# EAGLE board avr (EAGLE 5.07)
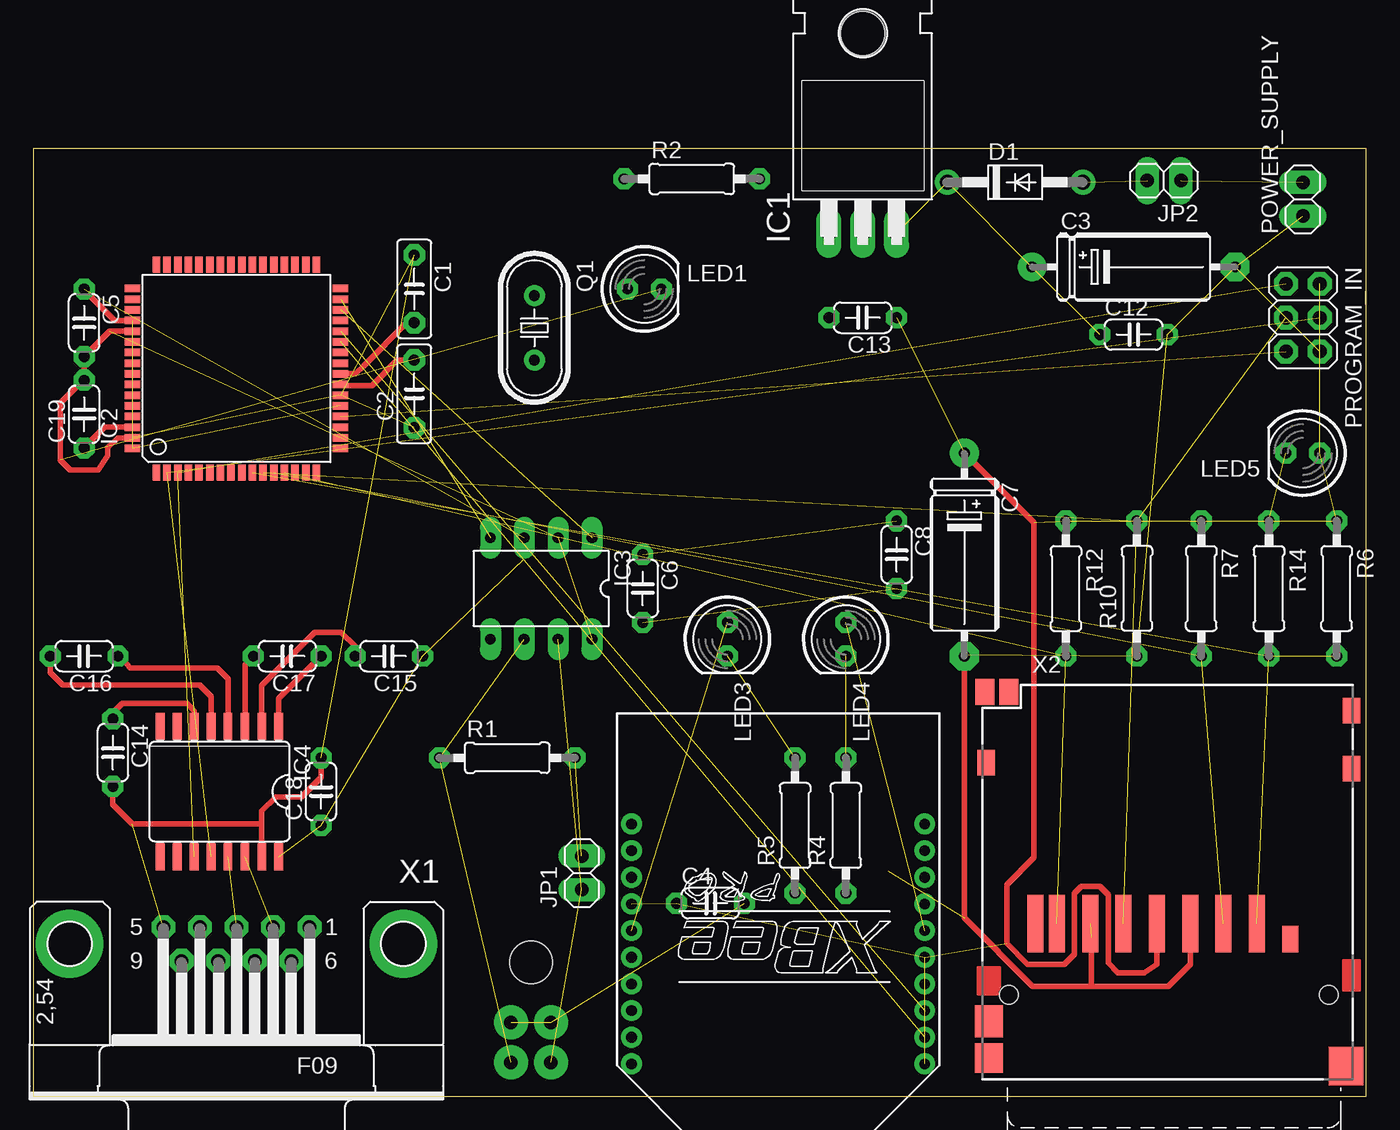
[diagram p0: board, top side]
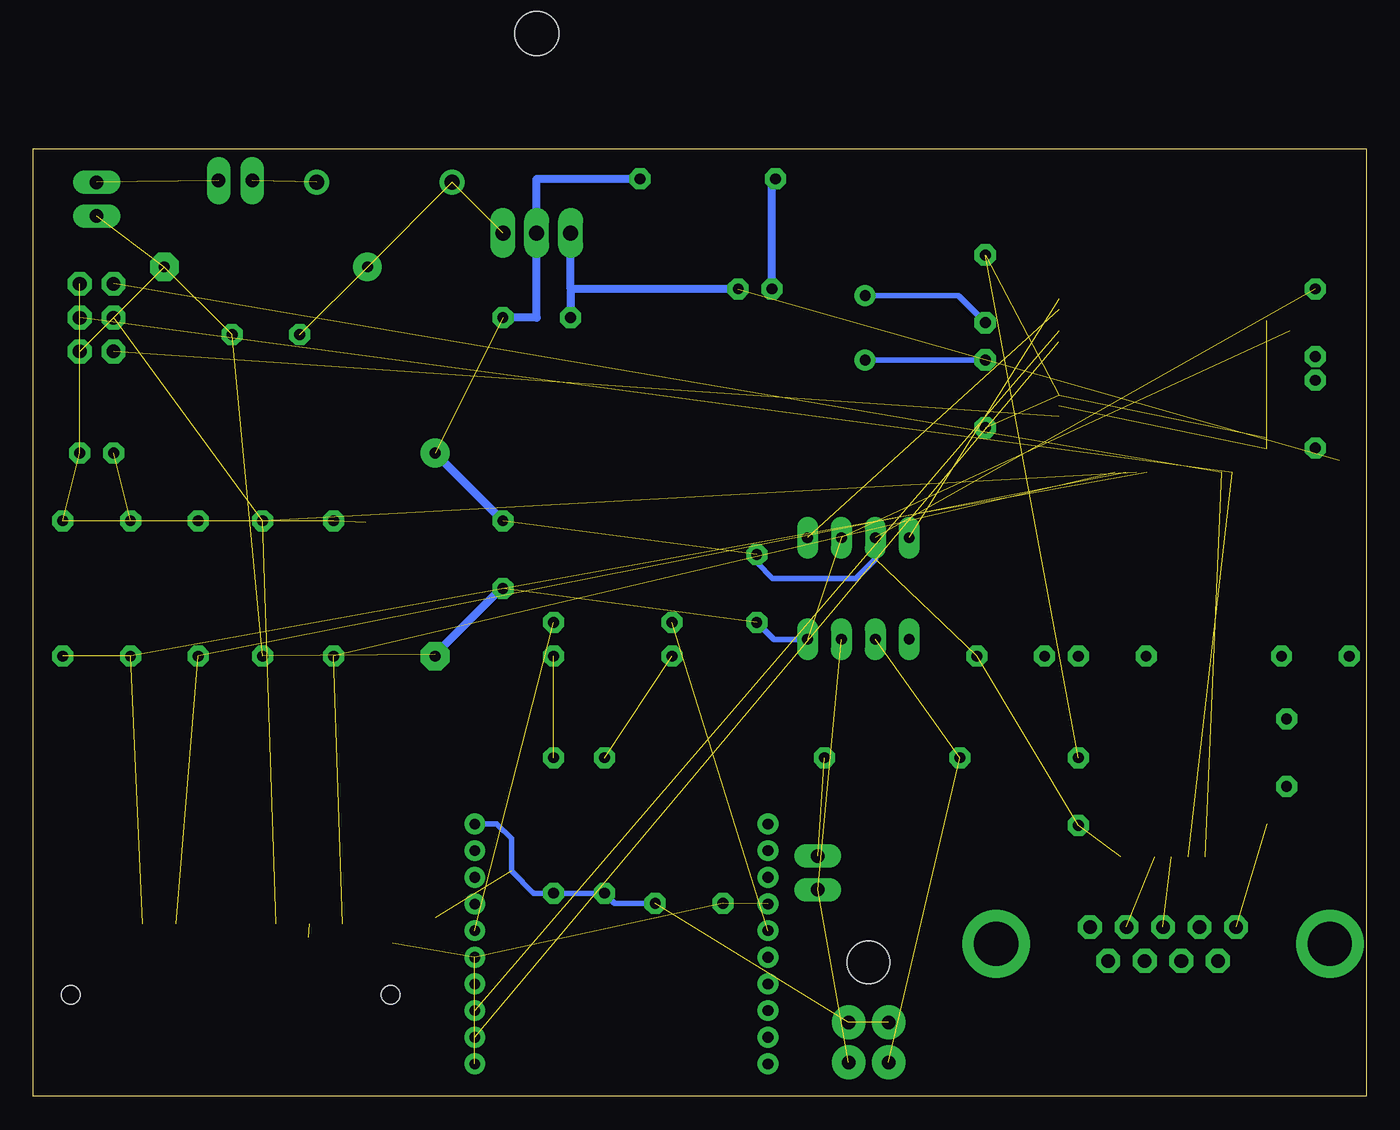
[diagram p1: board, bottom side, seen from below]

Size 100 x 71.11 mm. Coordinates in mm from the lower left corner, seen from the top.
Outline: 0,0 100,0 100,71.11 0,71.11 0,0
Copper layers (1*16): Top 0.035mm / dielectric 1.5mm / Bottom 0.035mm
Design rules "default *": minimum track width 10mil, minimum drill 24mil, track to track 12mil, track to pad 12mil, pad to pad 8mil, via to via 12mil, smd to smd 8mil, copper to edge 40mil, drill to drill 8mil, minimum pad ring 15mil, minimum via ring 8mil, stop-mask expansion 4mil, vias tented up to drill 0mil, thermal gap 10mil
tRestrict: area 43.2,1.3 to 45.7,21.6; area 66,1.3 to 68.6,21.6; area 33,40.6 to 43.2,43.2; area 33,33 to 43.2,35.6; area 35.4,1.9 to 39.2,7; area 34.3,1.3 to 40.6,6.3; area 59.7,31.8 to 62.2,36.8; area 50.8,31.8 to 53.3,35.6; area 50.8,35.6 to 53.3,36.8; area 92.7,47 to 97.8,49.5; area 94,64.8 to 96.5,69.8; area 92.7,54.6 to 97.8,62.2; 7 more areas

## Footprints (pad centres in the part's own frame; a part is rotated, then mirrored left to right if it is on the bottom)
C5B2.5 = drill 0.813 pad 1.6 octagon: 1 -2.54,0; 2 2.54,0
E15-5 = drill 0.813 pad 2.159 round: + -7.62,0 | drill 0.813 pad 2.159 octagon: - 7.62,0
C050-024X044 = drill 0.813 octagon: 1 -2.54,0; 2 2.54,0
DO41-10 = drill 1.118 round: A 5.08,0; C -5.08,0
TO220H = drill 1.118 long: 1 -2.54,-10.16; 2 0,-10.16; 3 2.54,-10.16 | hole 3.302: 0,4.826
TQFP64 = smd 1.194 x 0.559: 1 -7.8,6; 2 -7.8,5.2; 3 -7.8,4.4; 4 -7.8,3.6; 5 -7.8,2.8; 6 -7.8,2; 7 -7.8,1.2; 8 -7.8,0.4; 9 -7.8,-0.4; 10 -7.8,-1.2; 11 -7.8,-2; 12 -7.8,-2.8; 13 -7.8,-3.6; 14 -7.8,-4.4; 15 -7.8,-5.2; 16 -7.8,-6; 33 7.8,-6; 34 7.8,-5.2; 35 7.8,-4.4; 36 7.8,-3.6; 37 7.8,-2.8; 38 7.8,-2; 39 7.8,-1.2; 40 7.8,-0.4; 41 7.8,0.4; 42 7.8,1.2; 43 7.8,2; 44 7.8,2.8; 45 7.8,3.6; 46 7.8,4.4; 47 7.8,5.2; 48 7.8,6 | smd 0.559 x 1.194: 17 -6,-7.8; 18 -5.2,-7.8; 19 -4.4,-7.8; 20 -3.6,-7.8; 21 -2.8,-7.8; 22 -2,-7.8; 23 -1.2,-7.8; 24 -0.4,-7.8; 25 0.4,-7.8; 26 1.2,-7.8; 27 2,-7.8; 28 2.8,-7.8; 29 3.6,-7.8; 30 4.4,-7.8; 31 5.2,-7.8; 32 6,-7.8; 49 6,7.8; 50 5.2,7.8; 51 4.4,7.8; 52 3.6,7.8; 53 2.8,7.8; 54 2,7.8; 55 1.2,7.8; 56 0.4,7.8; 57 -0.4,7.8; 58 -1.2,7.8; 59 -2,7.8; 60 -2.8,7.8; 61 -3.6,7.8; 62 -4.4,7.8; 63 -5.2,7.8; 64 -6,7.8
DIL08 = drill 0.813 long: 1 -3.81,-3.81; 2 -1.27,-3.81; 3 1.27,-3.81; 4 3.81,-3.81; 5 3.81,3.81; 6 1.27,3.81; 7 -1.27,3.81; 8 -3.81,3.81
SO16L = smd 0.66 x 2.032: 1 -4.445,-4.902; 2 -3.175,-4.902; 3 -1.905,-4.902; 4 -0.635,-4.902; 5 0.635,-4.902; 6 1.905,-4.902; 7 3.175,-4.902; 8 4.445,-4.902; 9 4.445,4.902; 10 3.175,4.902; 11 1.905,4.902; 12 0.635,4.902; 13 -0.635,4.902; 14 -1.905,4.902; 15 -3.175,4.902; 16 -4.445,4.902
1X02 = drill 1.016 long: 1 -1.27,0; 2 1.27,0
LED5MM = drill 0.813 octagon: A -1.27,0; K 1.27,0
2X03 = drill 1.016 octagon: 1 -2.54,-1.27; 2 -2.54,1.27; 3 0,-1.27; 4 0,1.27; 5 2.54,-1.27; 6 2.54,1.27
HC49U70 = drill 0.813 round: 1 -2.413,0; 2 2.413,0
0207/10 = drill 0.813 octagon: 1 -5.08,0; 2 5.08,0
MICROFIT4SOCK = drill 1 pad 2.54 round: PIN1 -2,0; PIN2 1,0; PIN3 -2,-3; PIN4 1,-3 | hole 3.2: -0.5,-7.5
F09HP = drill 1.016 octagon: 1 -5.486,-1.27; 2 -2.743,-1.27; 3 0,-1.27; 4 2.743,-1.27; 5 5.486,-1.27; 6 -4.115,1.27; 7 -1.372,1.27; 8 1.372,1.27; 9 4.115,1.27 | drill 3.302 pad 5.08 round: G1 -12.522,0; G2 12.522,0
SDBMF-009XXBXX2 = smd 1.2 x 4.3: 1 6.7,5.325; 2 4.2,5.325; 3 1.7,5.325; 4 -0.8,5.325; 5 -3.3,5.325; 6 -5.8,5.325; 7 -8.3,5.325; 8 -9.925,5.325 | smd 1.2 x 2: 9 9.2,4.175 | smd 2.1 x 2.4: M1 -13.4,-2 | smd 2.6 x 2.9: M2 13.4,-5.35 | smd 1.3 x 1.9: M3 -13.6,17.4; M4 13.8,16.95; M5 13.8,21.3 | smd 1.4 x 1.95: SW1 -11.9,22.7; SW3 -13.7,22.7 | smd 2.1 x 2.2: SW2 -13.4,-4.75 | hole 1.4: -11.9,0; 12.1,0
XBEE-PRO = drill 0.8 pad 1.27 round: 1 -11,9; 2 -11,7; 3 -11,5; 4 -11,3; 5 -11,1; 6 -11,-1; 7 -11,-3; 8 -11,-5; 9 -11,-7; 10 -11,-9; 11 11,-9; 12 11,-7; 13 11,-5; 14 11,-3; 15 11,-1; 16 11,1; 17 11,3; 18 11,5; 19 11,7; 20 11,9

## Placement (x,y rotation side)
C1  22pF  [C5B2.5]  28.57,60.58 270 top
C2  22pF  [C5B2.5]  28.57,52.7 90 top
C3  330uF  [E15-5]  82.55,62.23 0 top
C4  100nF  [C050-024X044]  50.8,14.48 0 top
C5  100nF  [C050-024X044]  3.81,58.04 270 top
C6  100nF  [C050-024X044]  45.72,38.1 270 top
C7  4.7uF  [E15-5]  69.85,40.64 270 top
C8  100nF  [C050-024X044]  64.77,40.64 270 top
C12  100nF  [C050-024X044]  82.55,57.15 0 top
C13  100nF  [C050-024X044]  62.23,58.42 180 top
C14  100nF  [C050-024X044]  5.97,25.78 270 top
C15  100nF  [C050-024X044]  26.67,33.02 180 top
C16  100nF  [C050-024X044]  3.81,33.02 180 top
C17  100nF  [C050-024X044]  19.05,33.02 180 top
C18  100nF  [C050-024X044]  21.59,22.86 90 top
C19  100nF  [C050-024X044]  3.81,51.18 90 top
D1  1N4004  [DO41-10]  73.66,68.58 0 top
IC1  317T  [TO220H]  62.23,74.93 0 top
IC2  MEGA128-A  [TQFP64]  15.24,54.61 90 top
IC3  PCA82C250  [DIL08]  38.1,38.1 180 top
IC4  MAX3232EWE  [SO16L]  13.97,22.86 180 top
JP1  [1X02]  41.15,16.76 90 top
JP2  [1X02]  84.84,68.71 180 top
LED1  [LED5MM]  45.85,60.58 0 top
LED3  [LED5MM]  52.07,34.29 270 top
LED4  [LED5MM]  60.96,34.29 270 top
LED5  [LED5MM]  95.25,48.26 180 top
POWER_SUPPLY  [1X02]  95.25,67.31 90 top
PROGRAM_IN  [2X03]  95.25,58.42 270 top
Q1  18.4320 MHz  [HC49U70]  37.59,57.66 270 top
R1  120  [0207/10]  35.56,25.4 0 top
R2  250  [0207/10]  49.4,68.83 0 top
R4  250  [0207/10]  60.96,20.32 90 top
R5  250  [0207/10]  57.15,20.32 90 top
R6  47k  [0207/10]  97.79,38.1 270 top
R7  47k  [0207/10]  87.63,38.1 270 top
R10  47k  [0207/10]  82.8,38.1 90 top
R12  47k  [0207/10]  77.47,38.1 270 top
R14  500  [0207/10]  92.71,38.1 270 top
U$1  MICROFIT4  [MICROFIT4SOCK]  36.83,2.54 180 top
X1  [F09HP]  15.24,11.43 180 top
X2  SDBMF  [SDBMF-009XXBXX2]  85.09,7.62 0 top
XB1  XBEE-PRO  [XBEE-PRO]  55.88,11.43 180 top

## Library data of the parts
C1 C2 = capacitor-wima
C3-C8 C12-C19 = rcl
D1 = diode
IC1 = linear
IC2 = atmel
IC3 = micro-philips
IC4 = maxim
JP1 JP2 POWER_SUPPLY PROGRAM_IN = pinhead
LED1 LED3-LED5 = led
Q1 = crystal
R1 R2 R4-R7 R10 R12 R14 = resistor
U$1 = UNICORN
X1 = con-subd
X2 = farnell
XB1 = maxstream

## Nets
+5V: C4.1 C5.1 C6.1 C7.+ C8.1 C13.1 C15.1 C18.1 IC1.2 IC2.21 IC2.52 IC2.64 IC3.3 IC4.16 LED5.A PROGRAM_IN.2 R2.2 R6.1 R7.1 R12.1 X2.4 XB1.1 XB1.5 XB1.14
CANJUMP1: IC3.7 JP1.1 U$1.PIN1
CANJUMP2: JP1.2 R1.2
CS: IC2.10 R6.2 R14.2 X2.1
MISO/TXD0: IC2.3 IC4.11 PROGRAM_IN.1
MOSI/RXD0: IC2.2 IC4.12 PROGRAM_IN.4
N$1: C1.2 IC2.24 Q1.1
N$2: C2.2 IC2.23 Q1.2
N$4: D1.A JP2.2
N$5: JP2.1 POWER_SUPPLY.2
N$6: LED1.A R2.1
N$10: C19.1 IC2.62
N$21: IC4.13 X1.3
N$33: IC4.14 X1.2
N$35: C17.1 IC4.1
N$36: C17.2 IC4.3
N$37: C16.1 IC4.4
N$38: C16.2 IC4.5
N$39: C14.1 IC4.6
N$41: C15.2 IC4.2
N$50: LED4.A XB1.6
N$51: IC3.6 R1.1 U$1.PIN2
N$52: LED3.A XB1.15
N$57: LED4.K R4.2
N$58: LED3.K R5.2
N$59: LED5.K R14.1
PE: C1.1 C2.1 C3.- C4.2 C5.2 C6.2 C7.- C8.2 C12.2 C13.2 C14.2 C18.2 C19.2 IC1.1 IC2.22 IC2.53 IC2.63 IC3.2 IC3.8 IC4.15 LED1.K POWER_SUPPLY.1 PROGRAM_IN.6 R4.1 R5.1 R10.1 U$1.PIN3 U$1.PIN4 X1.5 X2.3 X2.6 XB1.10
RESET: IC2.20 PROGRAM_IN.5
RXCAN: IC2.31 IC3.4
RXD1: IC2.27 XB1.2
SCK: IC2.11 PROGRAM_IN.3 R10.2 X2.5
SDMISO: IC2.13 R12.2 X2.7
SDMOSI: IC2.12 R7.2 X2.2
TXCAN: IC2.30 IC3.1
TXD1: IC2.28 XB1.3
VCC: C3.+ C12.1 D1.C IC1.3

## Tracks (layer width: path | path; a pad name or v marks a point on that pad's centre or on a via)
+5V  (17 unrouted)
  Top 0.406: IC2.52 6.1,58.21 3.81,60.5 C5.1 | C7.+ 75.06,43.05 75.06,17.91 73.03,15.88 73.03,11.48 74.6,9.91 77.36,9.91 78.11,10.65 78.11,15.21 78.64,15.75 80.01,15.75 80.64,15.11 80.64,10.01 81.39,9.27 83.37,9.27 84.29,9.88 X2.4
  Bottom 0.406: IC3.3 36.83,40.31 38.28,38.86 44.55,38.86 45.72,40.03 C6.1
  Bottom 0.61: C7.+ C8.1 | C13.1 62.23,58.42 IC1.2 62.23,68.83 R2.2
CANJUMP1  (2 unrouted)
CANJUMP2  (1 unrouted)
CS  (3 unrouted)
MISO/TXD0  (2 unrouted)
MOSI/RXD0  (2 unrouted)
N$1
  Top 0.406: C1.2 28.01,58.04 24.77,54.8 24.2,54.23 23.04,54.23 IC2.24
  Bottom 0.406: Q1.1 30.61,60.07 C1.2
N$2
  Top 0.406: C2.2 27.3,55.24 25.4,53.34 23.04,53.34 IC2.23
  Bottom 0.406: Q1.2 C2.2
N$4  (1 unrouted)
N$5  (1 unrouted)
N$6
  Bottom 0.61: R2.1 44.58,68.83 LED1.A
N$10
  Top 0.406: IC2.62 5.36,50.21 3.81,48.66 C19.1
N$21  (1 unrouted)
N$33  (1 unrouted)
N$35
  Top 0.406: C17.1 18.41,29.84 IC4.1
N$36
  Top 0.406: C17.2 15.88,32.38 IC4.3
N$37
  Top 0.406: C16.1 6.48,33.02 7.26,32.15 7.47,32.13 13.79,32.13 14.61,31.32 IC4.4
N$38
  Top 0.406: C16.2 1.27,31.79 2.19,30.86 12.48,30.86 13.34,30.01 IC4.5
N$39
  Top 0.406: C14.1 5.97,28.75 6.69,29.46 11.53,29.46 12.06,28.93 IC4.6
N$41
  Top 0.406: IC4.2 17.14,30.82 21.12,34.8 23.11,34.8 24.13,33.77 C15.2
N$50  (1 unrouted)
N$51  (2 unrouted)
N$52  (1 unrouted)
N$57  (1 unrouted)
N$58  (1 unrouted)
N$59  (1 unrouted)
PE  (18 unrouted)
  Top 0.406: 17.14,20.45 17.14,21.4 18.22,22.48 20.14,22.48 21.59,23.93 C18.2 | 17.14,20.45 IC4.15 | C14.2 5.97,21.89 7.42,20.45 17.14,20.45 | IC2.53 5.72,57.41 C5.2 C19.2 3.76,53.72 2.03,51.99 2.03,47.73 2.77,46.99 4.87,46.99 5.59,48.09 5.59,48.66 6.33,49.4 IC2.63 | C7.- 69.85,13.37 74.97,8.26 79.38,8.26 | 79.38,8.26 79.38,11.94 | 79.38,8.26 85.16,8.26 86.79,9.89 X2.3
  Bottom 0.406: C4.2 56.39,14.48 R5.1 R4.1 62.48,15.24 64.14,16.9 64.14,19.36 65.23,20.45 66.88,20.45 XB1.10 | IC3.8 44.45,34.29 C6.2
  Bottom 0.61: C7.- 69.85,33.17 64.92,38.1 C8.2 | LED1.K 59.69,60.58 | 59.69,60.58 C13.2 | 59.69,60.58 IC1.1
RESET  (1 unrouted)
RXCAN  (1 unrouted)
RXD1  (1 unrouted)
SCK  (3 unrouted)
SDMISO  (2 unrouted)
SDMOSI  (2 unrouted)
TXCAN  (1 unrouted)
TXD1  (1 unrouted)
VCC  (3 unrouted)